# Altium PCB Digital clock schematic.PcbDoc
Units mil, origin at the board's own origin, x right, y up, seen from the top; angles counter-clockwise.
Board outline 6000 x 4000 mil, 2 copper layers (Top Layer, Bottom Layer); 22 components, 26 nets, 183 pads, 6 vias.
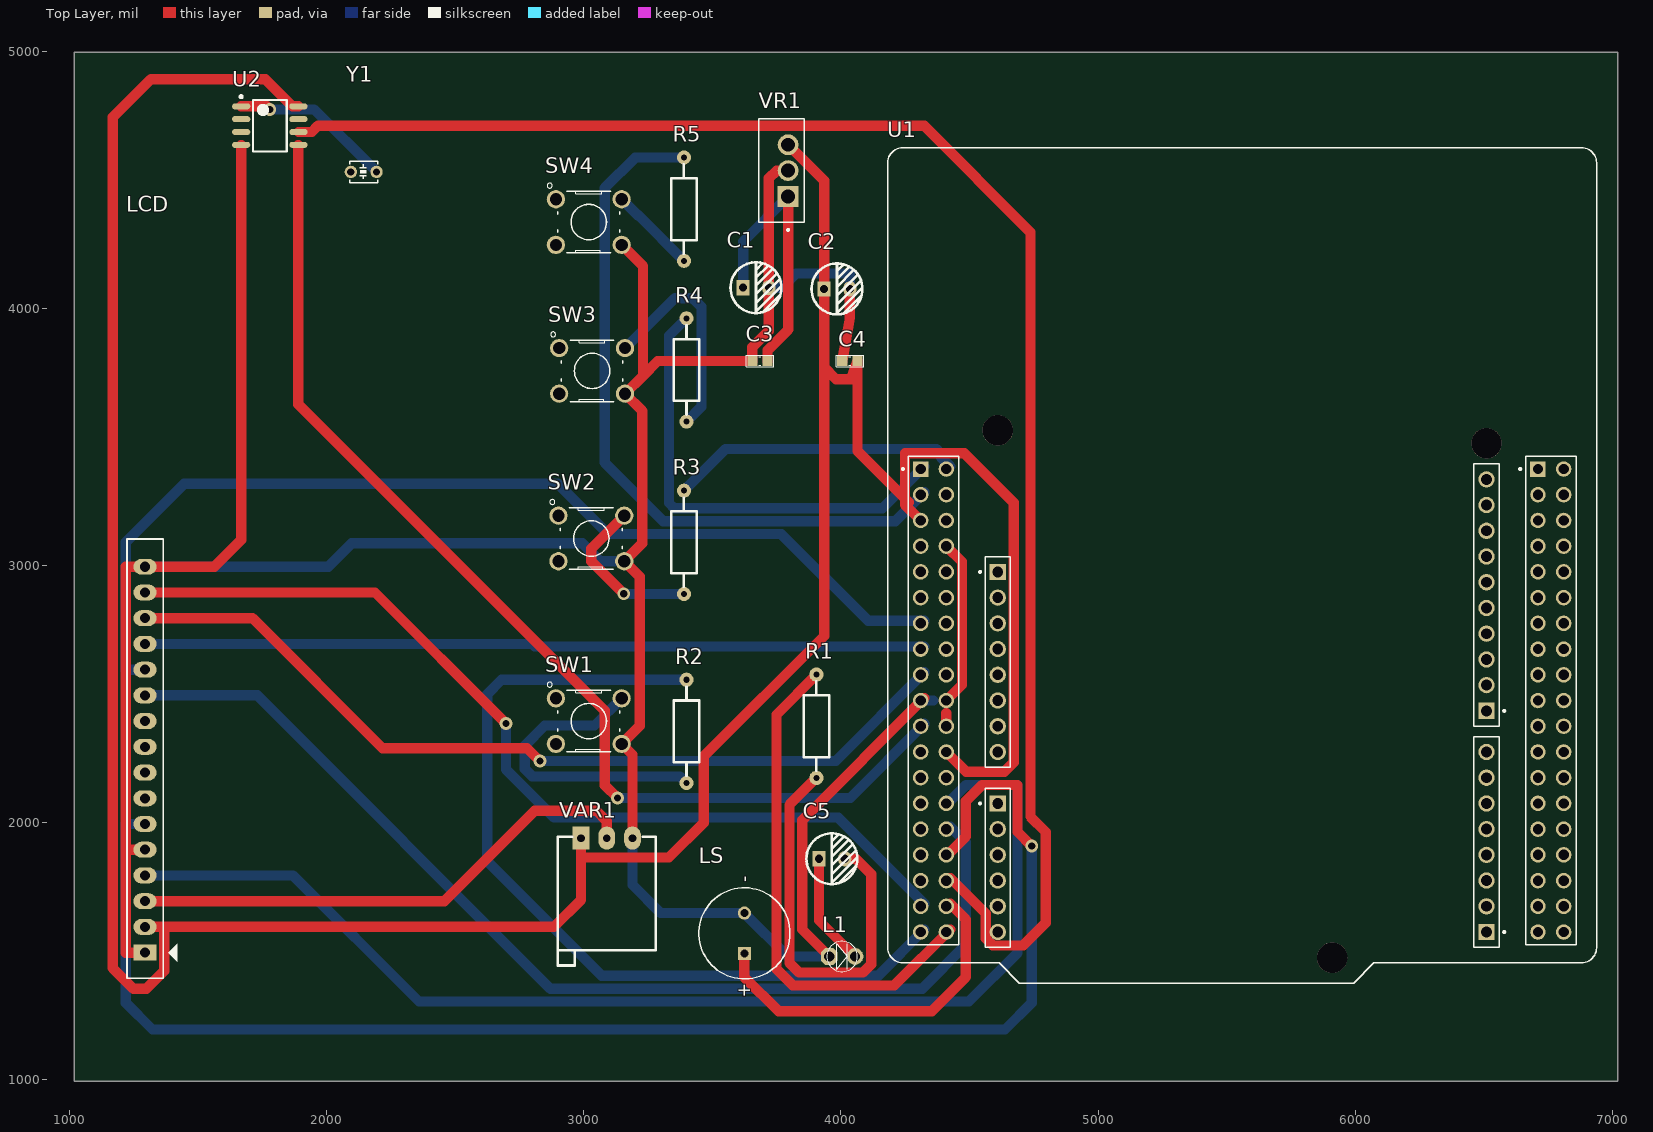
[diagram p0: Top Layer view]
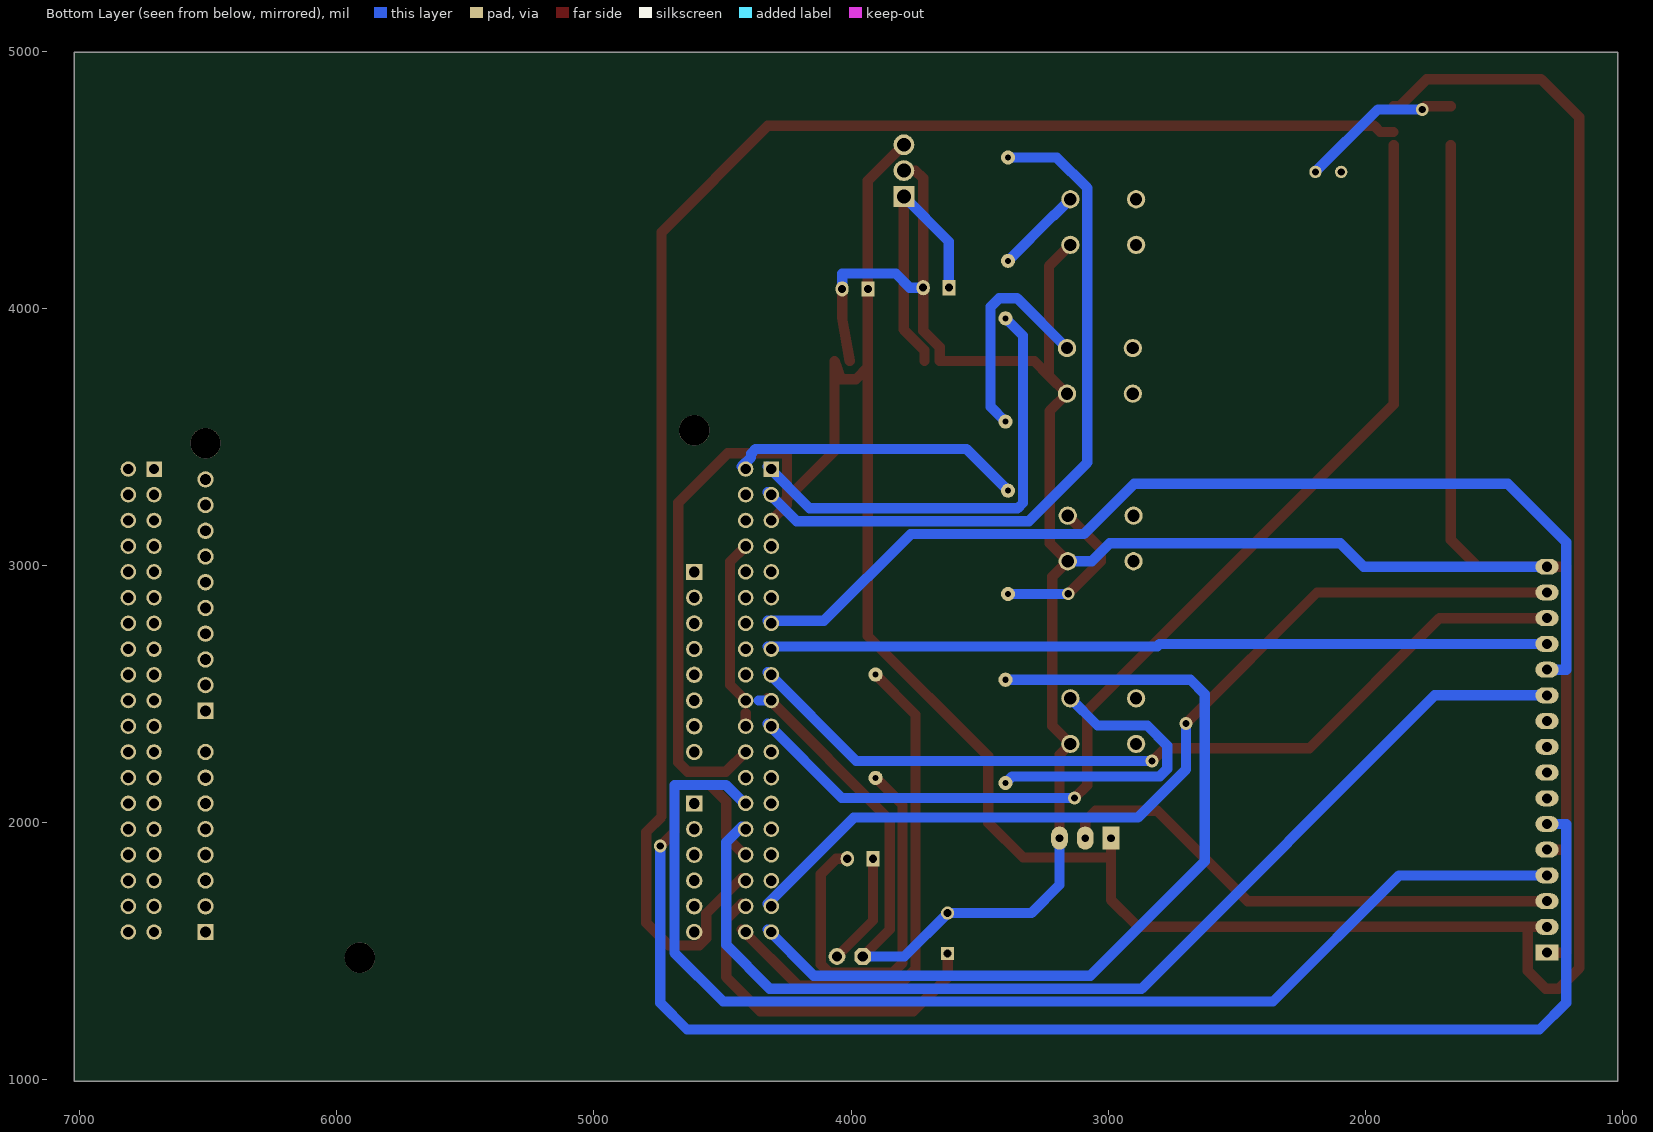
[diagram p1: Bottom Layer view, seen from below]
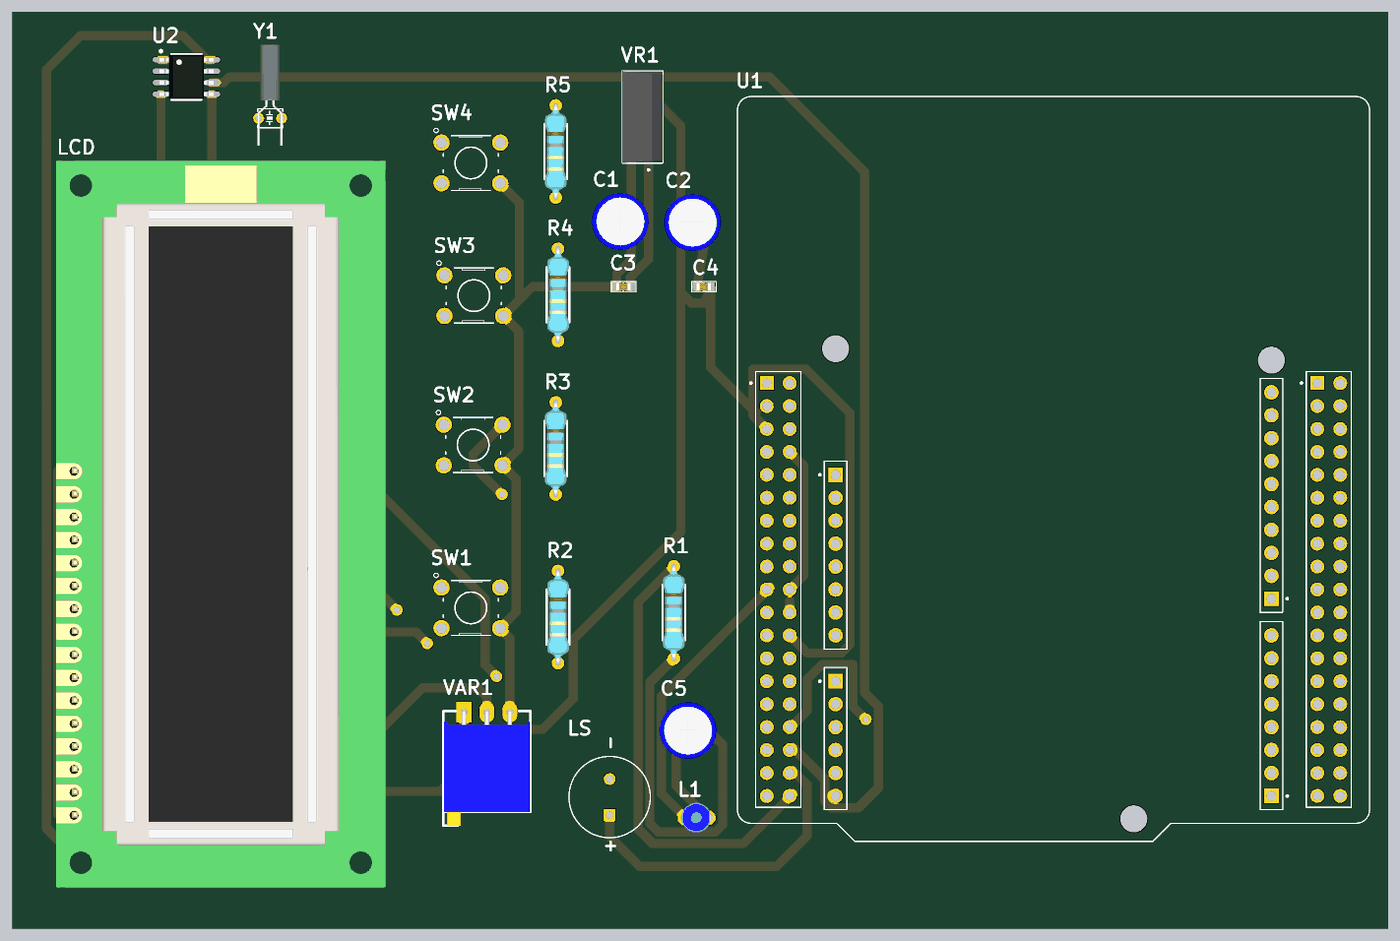
[diagram p2: 3D render of the assembled board from above, using the file's embedded part models]

## Layer stack, top to bottom
Top Solder: solder mask 0.4, Solder Resist, Dk 3.5
Top Layer: signal copper 1.4
Dielectric 1: dielectric 12.6, FR-4, Dk 4.8
Bottom Layer: signal copper 1.4
Bottom Solder: solder mask 0.4, Solder Resist, Dk 3.5

## Board outline
1020,995 7020,995 7020,4995 1020,4995

## Design rules (kind name [scope] priority, off if disabled: settings)
Clearance [All] p1: gap=10 ignorepadtopadclearanceinfootprint=FALSE except(0: Arc-Hole Track-Hole SMDPad-Hole THPad-Hole Via-Hole Fill-Hole Poly-Hole Region-Hole Text-Hole)
PolygonConnect [All] p1: connectstyle=Relief reliefconductorwidth=10 reliefentries=4 polygonreliefangle="90 Angle" airgapwidth=10
RoomDefinition "Digital clock schematic" [InComponentClass('Digital clock schematic')] p1: confinementstyle=ConfineIn formatcopy=TRUE lockcomponents=FALSE outline 7154.53,1020 13504.06,1020 13504.06,4755 7154.53,4755
RoutingVias [All] p1: holewidth=28 width=50 viastyle="Through Hole" minholewidth=28 minwidth=50 maxholewidth=28 maxwidth=50
SolderMaskExpansion [All] p1: expansion=4 istentingtop=FALSE
Width [All] p1: maxlimit=80 minlimit=20 preferedwidth=40
30 further rules are at their usual default settings.

## Components (designator, comment, footprint, x,y, rotation, side; value= is the part's Value field where it differs from the comment)
C1 "100uF" "tu hoa 5mm" 3670,4080 r0 top
C2 "100uF" "tu hoa 5mm" 3985,4075 r0 top
C3 "104" "tu 0603" 3685.47,3795 r0 top
C4 "104" "tu 0603" 4035,3795 r0 top
C5 "1uF" "tu hoa 5mm" 3965,1860 r0 top
L1 "LED 3mm" LED-3MM-BLUE 4010,1480 r0 top
LCD "LCD1602 XL" "LCD1602 with Jump" 1295,1495 r90 top
LS "CST-931AP" CUI_CST-931AP 3625,1570 r90 top
R1 "330R" "tro vach 1/4w" 3905,2375 r90 top
R2 "360R" "tro vach 1/4w" 3400,2355 r90 top
R3 "360R" "tro vach 1/4w" 3390,3090 r90 top
R4 "360R" "tro vach 1/4w" 3400,3760 r90 top
R5 "360R" "tro vach 1/4w" 3390,4385 r90 top
SW1 "TS-1109" SW_TS-1109 3020,2395 r0 top
SW2 "TS-1109" SW_TS-1109 3030,3105 r0 top
SW3 "TS-1109" SW_TS-1109 3032.95,3756.42 r0 top
SW4 "TS-1109" SW_TS-1109 3020,4335 r0 top
U1 "NUCLEO-F401RE" ST_NUCLEO-F401RE 5560,3000.59 r0 top
U2 "DS1307" "SOP 8" 1780,4710 r0 top
VAR1 "10K" "BIEN TRO VI CHINH NAM" 3090,1935 r0 top
VR1 "L7805" TO255P1020X450X2000-3 3768.92,4535 r90 top
Y1 "16Mhz" "Thach Anh 2 Chan 32,768 KHz" 2095,4530 r90 top value=4Mhz

## Footprints (in the part's own frame and the unit in brackets; to place one, negate y for a bottom-side part, rotate by r counter-clockwise, add the part's x,y. Pads: shape width x height; smd on the part's side, far side on the other; paste and mask are expansions set on the pad)
"BIEN TRO VI CHINH NAM" [mil]
  rect 65x90 hole 30: 1(-100,5)
  oval 65x90 hole 30: 2(0,5) 3(100,5)
  silkscreen extent -190,-490 190,10, body extent -187,-490 188,10, height 226
CUI_CST-931AP [mm]
  round 1.308 hole 0.8: M(2,0)
  rect 1.308x1.308 hole 0.8: P(-2,0)
  silkscreen extent -4.5,-4.5 4.5,4.5
"LCD1602 with Jump" [mil] "LCD dipslay 16x2, 16 pin"
  rect 62x90 hole 39: 1(0,0)
  oval 62x90 hole 39: 2(100,0) 3(200,0) 4(300,0) 5(400,0) 6(500,0) 7(600,0) 8(700,0) 9(800,0) 10(900,0) 11(1000,0) 12(1100,0) 13(1200,0) 14(1300,0) 15(1400,0) 16(1500,0)
  silkscreen extent -100,-125 1608,70, body extent -320,-1353 2850,84, height 764
LED-3MM-BLUE [mil]
  oct 65x65 hole 40: 1(-55,0)
  round 65 hole 40: 2(45,0)
  silkscreen extent -64,-59 54,59, body extent -72,-65 54,65, height 184
"SOP 8" [mm] "SOIC, 8-Leads, Body 4.9x3.9mm, Pitch 1.27mm, IPC High Density"
  oval 1.8x0.6 smd: 1(-2.825,1.905) 2(-2.825,0.635) 3(-2.825,-0.635) 4(-2.825,-1.905) 5(2.825,-1.905) 6(2.825,-0.635) 7(2.825,0.635) 8(2.825,1.905)
  silkscreen extent -2.95,-2.55 1.67,2.98, body extent -2.99,-2.45 3,2.45, height 1.6
ST_NUCLEO-F401RE [mm]
  rect 1.605x1.605 hole 1.07: CN5_1(24.13,-14.37) CN6_1(-24.13,-0.65) CN8_1(-24.13,-23.51) CN9_1(24.13,-36.21)
  round 1.605 hole 1.07: CN5_2(24.13,-11.83) CN5_3(24.13,-9.29) CN5_4(24.13,-6.75) CN5_5(24.13,-4.21) CN5_6(24.13,-1.67) CN5_7(24.13,0.87) CN5_8(24.13,3.41) CN5_9(24.13,5.95) CN5_10(24.13,8.49) CN6_2(-24.13,-3.19) CN6_3(-24.13,-5.73) CN6_4(-24.13,-8.27) CN6_5(-24.13,-10.81) CN6_6(-24.13,-13.35) CN6_7(-24.13,-15.89) CN6_8(-24.13,-18.43) CN8_2(-24.13,-26.05) CN8_3(-24.13,-28.59) CN8_4(-24.13,-31.13) CN8_5(-24.13,-33.67) CN8_6(-24.13,-36.21) CN9_2(24.13,-33.67) CN9_3(24.13,-31.13) CN9_4(24.13,-28.59) CN9_5(24.13,-26.05) CN9_6(24.13,-23.51) CN9_7(24.13,-20.97) CN9_8(24.13,-18.43)
  rect 1.53x1.53 hole 1.02: CN7_1(-31.75,9.51) CN10_1(29.21,9.51)
  round 1.53 hole 1.02: CN7_2(-29.21,9.51) CN7_3(-31.75,6.97) CN7_4(-29.21,6.97) CN7_5(-31.75,4.43) CN7_6(-29.21,4.43) CN7_7(-31.75,1.89) CN7_8(-29.21,1.89) CN7_9(-31.75,-0.65) CN7_10(-29.21,-0.65) CN7_11(-31.75,-3.19) CN7_12(-29.21,-3.19) CN7_13(-31.75,-5.73) CN7_14(-29.21,-5.73) CN7_15(-31.75,-8.27) CN7_16(-29.21,-8.27) CN7_17(-31.75,-10.81) CN7_18(-29.21,-10.81) CN7_19(-31.75,-13.35) CN7_20(-29.21,-13.35) CN7_21(-31.75,-15.89) CN7_22(-29.21,-15.89) CN7_23(-31.75,-18.43) CN7_24(-29.21,-18.43) CN7_25(-31.75,-20.97) CN7_26(-29.21,-20.97) CN7_27(-31.75,-23.51) CN7_28(-29.21,-23.51) CN7_29(-31.75,-26.05) CN7_30(-29.21,-26.05) CN7_31(-31.75,-28.59) CN7_32(-29.21,-28.59) CN7_33(-31.75,-31.13) CN7_34(-29.21,-31.13) CN7_35(-31.75,-33.67) CN7_36(-29.21,-33.67) CN7_37(-31.75,-36.21) CN7_38(-29.21,-36.21) CN10_2(31.75,9.51) CN10_3(29.21,6.97) CN10_4(31.75,6.97) CN10_5(29.21,4.43) CN10_6(31.75,4.43) CN10_7(29.21,1.89) CN10_8(31.75,1.89) CN10_9(29.21,-0.65) CN10_10(31.75,-0.65) CN10_11(29.21,-3.19) CN10_12(31.75,-3.19) CN10_13(29.21,-5.73) CN10_14(31.75,-5.73) CN10_15(29.21,-8.27) CN10_16(31.75,-8.27) CN10_17(29.21,-10.81) CN10_18(31.75,-10.81) CN10_19(29.21,-13.35) CN10_20(31.75,-13.35) CN10_21(29.21,-15.89) CN10_22(31.75,-15.89) CN10_23(29.21,-18.43) CN10_24(31.75,-18.43) CN10_25(29.21,-20.97) CN10_26(31.75,-20.97) CN10_27(29.21,-23.51) CN10_28(31.75,-23.51) CN10_29(29.21,-26.05) CN10_30(31.75,-26.05) CN10_31(29.21,-28.59) CN10_32(31.75,-28.59) CN10_33(29.21,-31.13) CN10_34(31.75,-31.13) CN10_35(29.21,-33.67) CN10_36(31.75,-33.67) CN10_37(29.21,-36.21) CN10_38(31.75,-36.21)
  round 3 hole 3 unplated: ""(-24.13,13.32) ""(8.89,-38.75) ""(24.13,12.05)
  silkscreen extent -35,-41.25 35,41.25
SW_TS-1109 [mm]
  round 1.8 hole 1.2: 1(-3.25,2.25) 2(3.25,2.25) 3(-3.25,-2.25) 4(3.25,-2.25)
  silkscreen extent -4.1,-3.05 3.05,3.85
"Thach Anh 2 Chan 32,768 KHz" [mil]
  round 48 hole 28: 1(0,0) 2(0,-100)
  silkscreen extent -42,-106 42,5, body extent -120,-105 321,6, height 66
TO255P1020X450X2000-3 [mm]
  rect 2.055x2.055 / inner round 2.055 / far side rect 2.055x2.055 hole 1.37: 1(-2.55,-0.662)
  round 2.055 hole 1.37: 2(0,-0.662) 3(2.55,-0.662)
  silkscreen extent -5.95,-2.25 5.1,2.25, body extent -5.1,-2.25 5.1,2.25, height 20
"tro vach 1/4w" [mm]
  round 1.4 hole 0.6: 1(-5.1,0) 2(5.1,0)
  silkscreen extent -4.39,-1.25 4.42,1.25, body extent -5.38,-1.2 5.38,1.2, height 2.41
"tu 0603" [mm] "Chip Capacitor, 2-Leads, Body 1,60x0,80mm, IPC Medium Density"
  rect 1x0.95 smd mask+0.076: 1(-0.75,0) 2(0.75,0)
  silkscreen extent -1.35,-0.58 1.37,0.58, body extent -0.8,-0.4 0.8,0.4, height 0.9
"tu hoa 5mm" [mm]
  rect 1.3x1.5 hole 0.8: 1(-1.27,0)
  oval 1.3x1.5 hole 0.8: 2(1.27,0)
  silkscreen extent -2.51,-2.51 2.51,2.51, body extent -3.12,-3.18 3.23,3.18, height 14.55

## Part data
C1: library part "Tu Hoa 100uF 25V 6x11", "Cắm", Chung_Loai=Cắm, Don_Vi=Con, Ma_Hang=MH001351, So_Chan=2, Ten_Linh_Kien="Tụ Hóa 100uF 25V 6x11MM"
C2: library part "Tu Hoa 100uF 16V 5x7", "Cắm", Chung_Loai=Cắm, Don_Vi=Con, Ma_Hang=MH001347, So_Chan=2, Ten_Linh_Kien="Tụ Hóa 100uF 16V 5x7MM"
C3 C4: library part "Tu 0603 104 50V 10%", "Dán", Chung_Loai=Dán, Don_Vi=Con, Ma_Hang=MH004568, So_Chan=2, Ten_Linh_Kien="Tụ 0603 104-100nF 10% 50V"
C5: library part "Tu Hoa 1uF 400V 6x10", "Cắm", Chung_Loai=Cắm, Don_Vi=Con, Ma_Hang=MH003742, So_Chan=2, Ten_Linh_Kien="Tụ Hóa 1uF 400V 6x10MM"
L1: library part "LED 3mm Xanh Duong", "Cắm", Chung_Loai=Cắm, Don_Vi=Con, Ma_Hang=MH009003, Ten_Linh_Kien="LED 3MM Xanh Dương SS (1000c)"
LCD: "LCD 1602 Xanh Lá", CHIP=HD44780, Ma_Hang=67HZ, NCC=NSHOP, Ten="Màn hình LCD 1602 Xanh Lá"
LS: "9 mm, 3 V, 85 dB, Through Hole, Magnetic Audio Transducer Buzzer", Package="CUI Inc.", Availability=Unavailable, CUI_purchase_URL=https://www.cuidevices.com/product/audio/buzzers/audio-transducers/cst-931ap?utm_source=snapeda.com&utm_medium=referral&utm_campaign=snapedaBOM, MF="CUI Devices", MP=CST-931AP, Price=None, SnapEDA_Link=https://www.snapeda.com/parts/CST-931AP/CUI%20Devices/view-part/1551284/?ref=snap
R1: library part "Tro Vach 1/4W 1% 330R", "Cắm", Chung_Loai=Cắm, Don_Vi=Con, Ma_Hang=MH006348, So_Chan=2, Ten_Linh_Kien="Trở Vạch 1/4w 1% 330R"
R2 R3 R4 R5: library part "Tro Vach 1/4W 1% 360R", "Cắm", Chung_Loai=Cắm, Don_Vi=Con, Ma_Hang=MH008835, So_Chan=2, Ten_Linh_Kien="Trở Vạch 1/4W 1% 360R"
SW1 SW2 SW3 SW4: "Heat Sink Full Brick DC/DC Converter Aluminum Top Mount", Package=None, Availability=Unavailable, MF="Samtec Inc.", MP=TS-1109, Price=None, SnapEDA_Link=https://www.snapeda.com/parts/TS-1109/Samtec%20Inc./view-part/106451/?ref=snap
U1: "STM32 Nucleo-64 development board with STM32F401RET6 MCU, supports Arduino and ST morpho connectivity", Package=None, Availability=Unavailable, MP=NUCLEO-F401RE, Price=None
U2: "C5145427"
VAR1: library part "Bien Tro Tinh Chinh 100R Nam", "Cắm", Chung_Loai=Cắm, Don_Vi=Con, Ma_Hang=MH003235, Ten_Linh_Kien="Biến Trở VR 101-100R 3296W"
VR1: "Standard Regulator Pos 5V 1.5A 3-Pin(3+Tab) TO-220FP Tube", Package=None, Availability="Not in stock", Check_prices=https://www.snapeda.com/parts/L7805/STMicroelectronics/view-part/?ref=eda, MF=STMicroelectronics, MP=L7805, Price=None, SnapEDA_Link=https://www.snapeda.com/parts/L7805/STMicroelectronics/view-part/?ref=snap
Y1: library part "Thach Anh 2 chan 32,768 Khz", "Crystal For all Crystal 2pin."

## Via types
v1: diameter 50, hole 28, Top Layer to Bottom Layer, 6 vias

## Nets (pads, with @x,y where several pads share a name; then routed paths per layer and width w, separated by ;. In a path a pad name is that pad's centre, name@x,y a point inside that pad or via, vN(x,y) a via of type N, cw(c..) or ccw(c..) an arc to the next point about the centre after c; other vN are vias at no path point)
+5: C2.1 C4.2 LCD.2 U1.CN7_5 U1.CN7_24 U2.8 VAR1.1 VR1.3 | length 12900.6
  Top Layer w40: LCD.2 1370,1595 ; U2.8 1868,4785 1763,4890 1318,4890 1170,4742 1170,1435 1250,1355 1300,1355 1370,1425 1370,1595 ; VAR1.1 2990,1865 ; VR1.3 3935,4495.39 C2.1 3935,3770 ; 4264,3246 4064.53,3445.47 C4.2 4038.53,3724 3981,3724 3935,3770 ; U1.CN7_5 4249,3236 4249,3436 4480,3436 4672,3244 4672,2235 4635,2198 4487,2198 U1.CN7_24 ; 1370,1595 2885,1595 2990,1700 2990,1865 ; 2990,1865 3332,1865 3467,2000 3467,2258 3935,2726 3935,3770
+12: C1.1 C3.2 VR1.1 | length 1099.8
  Top Layer w40: C3.2 3715,3837 3795,3917 VR1.1
  Bottom Layer w40: C1.1 3620,4259.61 VR1.1
"button alarm": R4.2 U1.CN7_1 | length 1815.2
  Bottom Layer w40: R4.2 3332,3892.79 3332,3243 3353,3222 4162,3222 U1.CN7_1@4325,3385
"button clk": R3.2 U1.CN7_2 | length 1138.6
  Bottom Layer w40: R3.2 3552.21,3453 4371,3453 4389,3435 4389,3421 U1.CN7_2@4425,3385
"button lcd blacklight": R5.2 U1.CN7_3 | length 2808.9
  Bottom Layer w40: R5.2 3200,4585.79 3082,4467.79 3082,3400 3310,3172 4212,3172 U1.CN7_3@4325,3285
"button rtc": R2.2 U1.CN7_37 | length 3407
  Bottom Layer w40: R2.2 2680.79,2555.79 2625,2500 2625,1850 3070,1405 4145,1405 U1.CN7_37@4325,1585
buzzer: LS.P U1.CN7_36 | length 1372.7
  Top Layer w40: LS.P 3625,1400 3758,1267 4353,1267 4486,1400 4486,1624 U1.CN7_36@4425,1685
GND: C1.2 C2.2 C3.1 C4.1 L1.1 LCD.1 LCD.5 LCD.16 LS.M SW1.4 SW2.4 SW3.4 SW4.4 U1.CN7_8 U1.CN7_19 U1.CN7_20 U1.CN7_22 U2.4 VAR1.3 VR1.2 | length 13115.1
  Top Layer w40: LCD.1 1220,1495 1220,1895 ; LCD.5 1220,1895 ; U2.4 1668.78,3100 1563.78,2995 LCD.16 1220,2995 1220,1895 ; SW4.4 3231,4163.37 3231,3737.93 ; VAR1.3 3190,2264.37 SW1.4 3218,2376.47 3218,2956.37 SW2.4 3228,3086.47 3228,3600.74 SW3.4 3231,3737.93 ; VR1.2 3750,4535 3720,4505 C1.2 3720,3913 3655.94,3848.94 C3.1 3288.07,3795 3231,3737.93 ; L1.1 3850,1585 3850,2010 U1.CN7_19@4325,2485 ; C4.1 4035,3964.53 C2.2 ; U1.CN7_22 4410,2425 ; U1.CN7_20 4471,2536 4471,3014 U1.CN7_8
  Bottom Layer w40: LCD.16 2007,2995 2098,3086 2994.42,3086 3064,3016.42 SW2.4 ; VAR1.3 3190,1758.74 3300,1648.74 LS.M 3793.74,1480 L1.1 ; C1.2 3772,4080 3827,4135 4035,4135 C2.2 ; U1.CN7_19 4360,2475
"lcd bla": LCD.15 U1.CN7_35 | length 3635.5
  Top Layer w40: LCD.15 2188.94,2895 v1(2697.94,2386)
  Bottom Layer w40: v1(2697.94,2386) 2697.94,2207.94 2885.88,2020 3990,2020 U1.CN7_35@4325,1685
"lcd d4": LCD.11 U1.CN7_30 | length 4218.9
  Bottom Layer w40: LCD.11 1731,2495 2871,1355 4316,1355 4486,1525 4486,1924 U1.CN7_30@4425,1985
"lcd d5": LCD.12 U1.CN7_13 | length 3990.2
  Bottom Layer w40: LCD.12 1220,2595 1220,3090 1448,3318 2900,3318 3096,3122 3769,3122 4106,2785 U1.CN7_13@4325,2785
"lcd d6": LCD.13 U1.CN7_15 | length 3034.1
  Bottom Layer w40: LCD.13 2800,2695 2810,2685 U1.CN7_15@4325,2685
"lcd d7": LCD.14 U1.CN7_17 | length 3402.8
  Top Layer w40: LCD.14 1713,2795 2218,2290 2780,2290 v1(2830,2240)
  Bottom Layer w40: v1(2830,2240) 3980,2240 U1.CN7_17@4325,2585
"lcd en": LCD.6 U1.CN7_32 | length 5698.5
  Top Layer w40: U1.CN7_32@4425,1885 4486,1946 4486,2083 4550,2147 4686.6,2147 4686.6,1964.4 v1(4742,1909)
  Bottom Layer w40: LCD.6 1220,1995 1220,1300 1324,1196 4638,1196 4742,1300 v1(4742,1909)
"lcd rs": LCD.4 U1.CN7_28 | length 4613.3
  Bottom Layer w40: LCD.4 1870,1795 2360,1305 4497,1305 4687,1495 4687,2147 4487,2147 U1.CN7_28@4425,2085
led: R1.2 U1.CN7_38 | length 2001
  Top Layer w40: R1.2 3750,2420.79 3750,1430 3812.5,1367.5 4207.5,1367.5 U1.CN7_38@4425,1585
NetC5_1: C5.1 L1.2 | length 438
  Top Layer w40: C5.1 3915,1620 L1.2
NetC5_2: C5.2 R1.1 | length 1587.6
  Top Layer w40: R1.1 3800,2069.21 3800,1455 3837.5,1417.5 4085.5,1417.5 4118,1450 4118,1800 4058,1860 C5.2
NetLCD_3: LCD.3 VAR1.2 | length 2023
  Top Layer w40: LCD.3 2459,1695 2810,2046 3050,2046 3090,2006 VAR1.2
NetR2_1: R2.1 SW1.2 | length 1195.7
  Bottom Layer w40: SW1.2 3042.37,2378 2849,2378 2771,2300 2771,2209 2800,2180 3374.21,2180 R2.1
NetR3_1: R3.1 SW2.2 | length 643.1
  Top Layer w40: v1(3156,2890) 3030,3016 3030,3065.63 SW2.2
  Bottom Layer w40: v1(3156,2890) 3156.79,2889.21 R3.1
NetR4_1: R4.1 SW3.2 | length 861.9
  Bottom Layer w40: SW3.2 3354.91,4039 3425,4039 3458,4006 3458,3617.21 R4.1
NetR5_1: R5.1 SW4.2 | length 341.2
  Bottom Layer w40: SW4.2 3210.53,4361 3213.21,4361 R5.1
NetU2_1: U2.1 Y1.2 | length 631.8
  Top Layer w40: U2.1 1768,4785 v1(1780,4773)
  Bottom Layer w40: v1(1780,4773) 1952,4773 Y1.2
"rtc scl": U1.CN7_34 U2.6 | length 6310.4
  Top Layer w40: U2.6 1943,4685 1967,4709 4324,4709 4737,4296 4737,2024 4797,1964 4797,1611 4709,1523 4590,1523 4563,1550 4563,1647 U1.CN7_34@4425,1785
"rtc sda": U1.CN7_21 U2.5 | length 4366
  Top Layer w40: U2.5 1891,4635 1891,3627 3082,2436 3082,2146 v1(3132,2096)
  Bottom Layer w40: v1(3132,2096) 4036,2096 U1.CN7_21@4325,2385
pads on no net: LCD.7 LCD.8 LCD.9 LCD.10 SW1.1 SW1.3 SW2.1 SW2.3 SW3.1 SW3.3 SW4.1 SW4.3 U1. U1.CN5_1 U1.CN5_2 U1.CN5_3 U1.CN5_4 U1.CN5_5 U1.CN5_6 U1.CN5_7 U1.CN5_8 U1.CN5_9 U1.CN5_10 U1.CN6_1 U1.CN6_2 U1.CN6_3 U1.CN6_4 U1.CN6_5 U1.CN6_6 U1.CN6_7 U1.CN6_8 U1.CN7_4 U1.CN7_6 U1.CN7_7 U1.CN7_9 U1.CN7_10 U1.CN7_11 U1.CN7_12 U1.CN7_14 U1.CN7_16 U1.CN7_18 U1.CN7_23 U1.CN7_25 U1.CN7_26 U1.CN7_27 U1.CN7_29 U1.CN7_31 U1.CN7_33 U1.CN8_1 U1.CN8_2 U1.CN8_3 U1.CN8_4 U1.CN8_5 U1.CN8_6 U1.CN9_1 U1.CN9_2 U1.CN9_3 U1.CN9_4 U1.CN9_5 U1.CN9_6 U1.CN9_7 U1.CN9_8 U1.CN10_1 U1.CN10_2 U1.CN10_3 U1.CN10_4 U1.CN10_5 U1.CN10_6 U1.CN10_7 U1.CN10_8 U1.CN10_9 U1.CN10_10 U1.CN10_11 U1.CN10_12 U1.CN10_13 U1.CN10_14 U1.CN10_15 U1.CN10_16 U1.CN10_17 U1.CN10_18 U1.CN10_19 U1.CN10_20 U1.CN10_21 U1.CN10_22 U1.CN10_23 U1.CN10_24 U1.CN10_25 U1.CN10_26 U1.CN10_27 U1.CN10_28 U1.CN10_29 U1.CN10_30 U1.CN10_31 U1.CN10_32 U1.CN10_33 U1.CN10_34 U1.CN10_35 U1.CN10_36 U1.CN10_37 U1.CN10_38 U2.2 U2.3 U2.7 Y1.1

## Text inside footprints (layer, text, board x,y; h text height)
LS: Top Overlay "+" at 3648.66,1318.79 h50.08 r90; Top Overlay "-" at 3648.67,1768.96 h50.1 r90